# Altium PCB LaserDriver.PcbDoc
Units mm, origin at the board's own origin, x right, y up, seen from the top; angles counter-clockwise.
Board outline 35 x 30 mm, 4 copper layers (Top Layer, VCC, GND, Bottom Layer), stack 1.522 mm thick; 95 components, 43 nets, 260 pads, 215 vias.
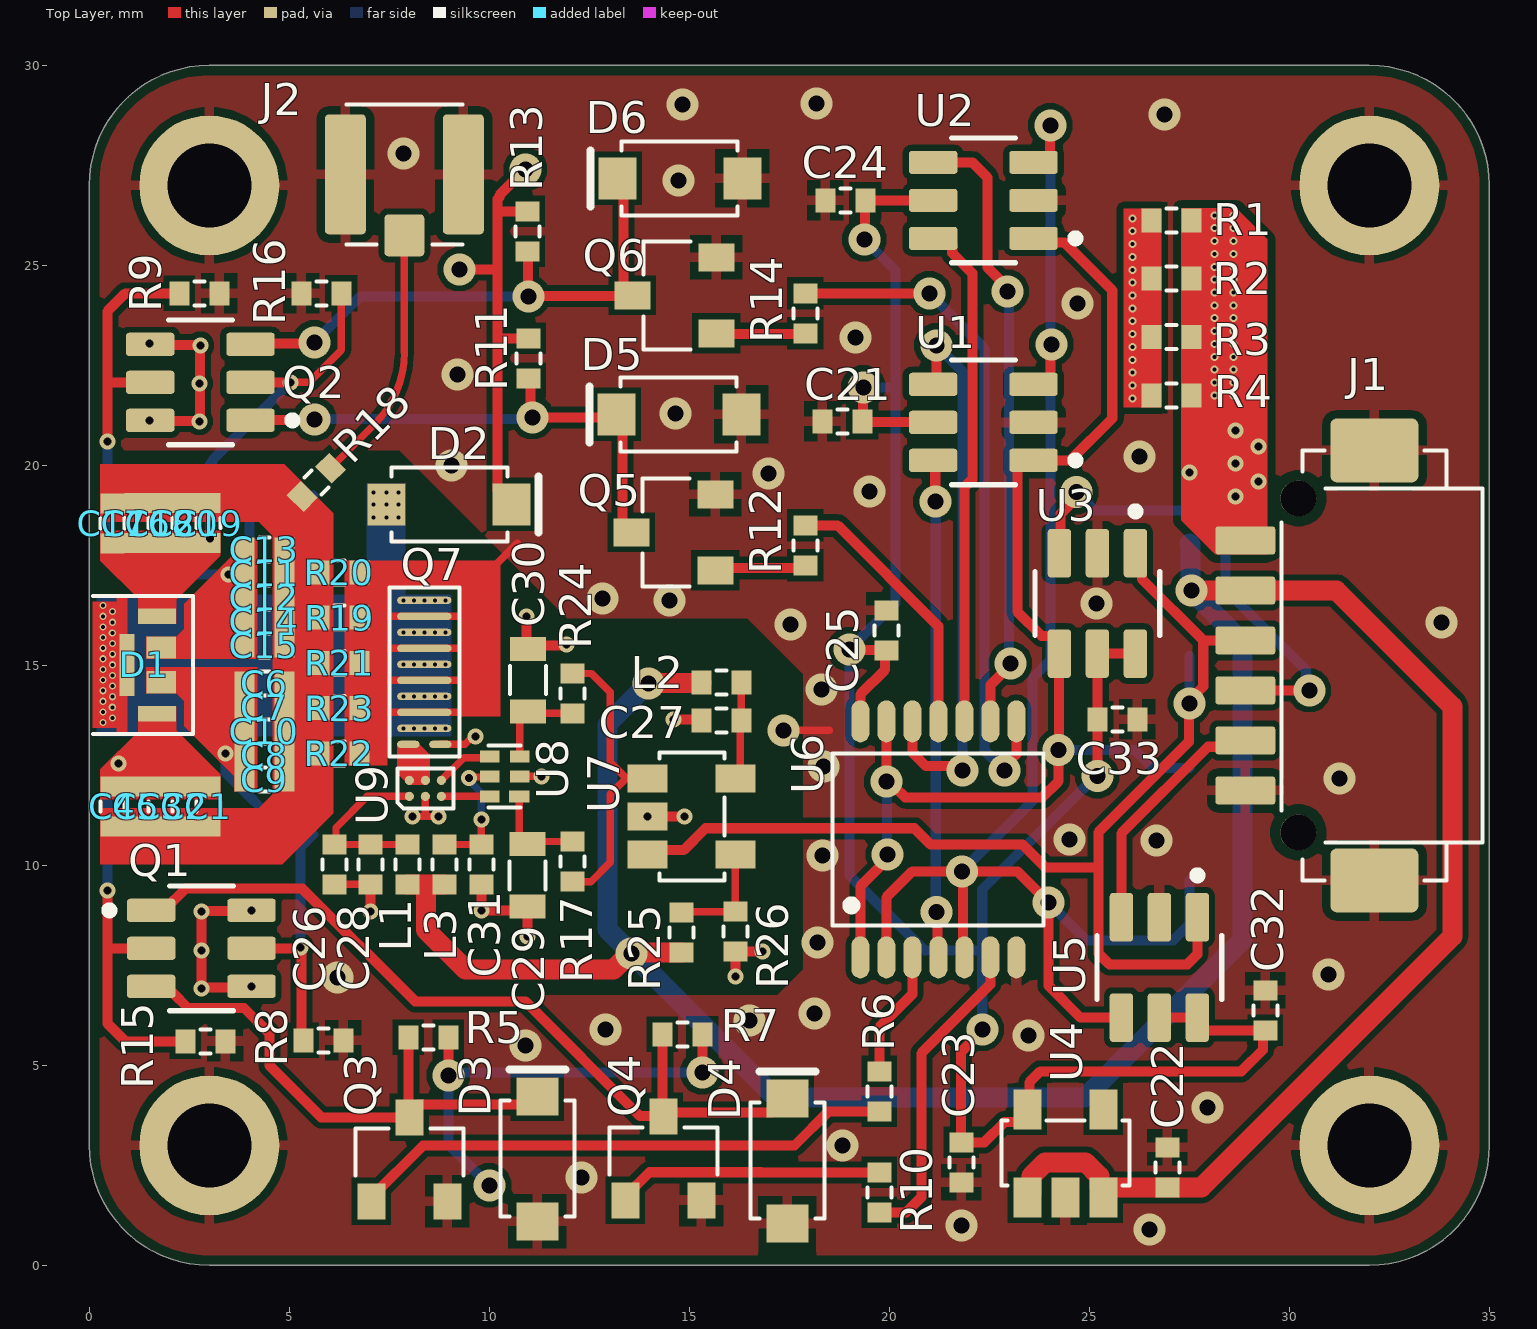
[diagram p0: Top Layer view]
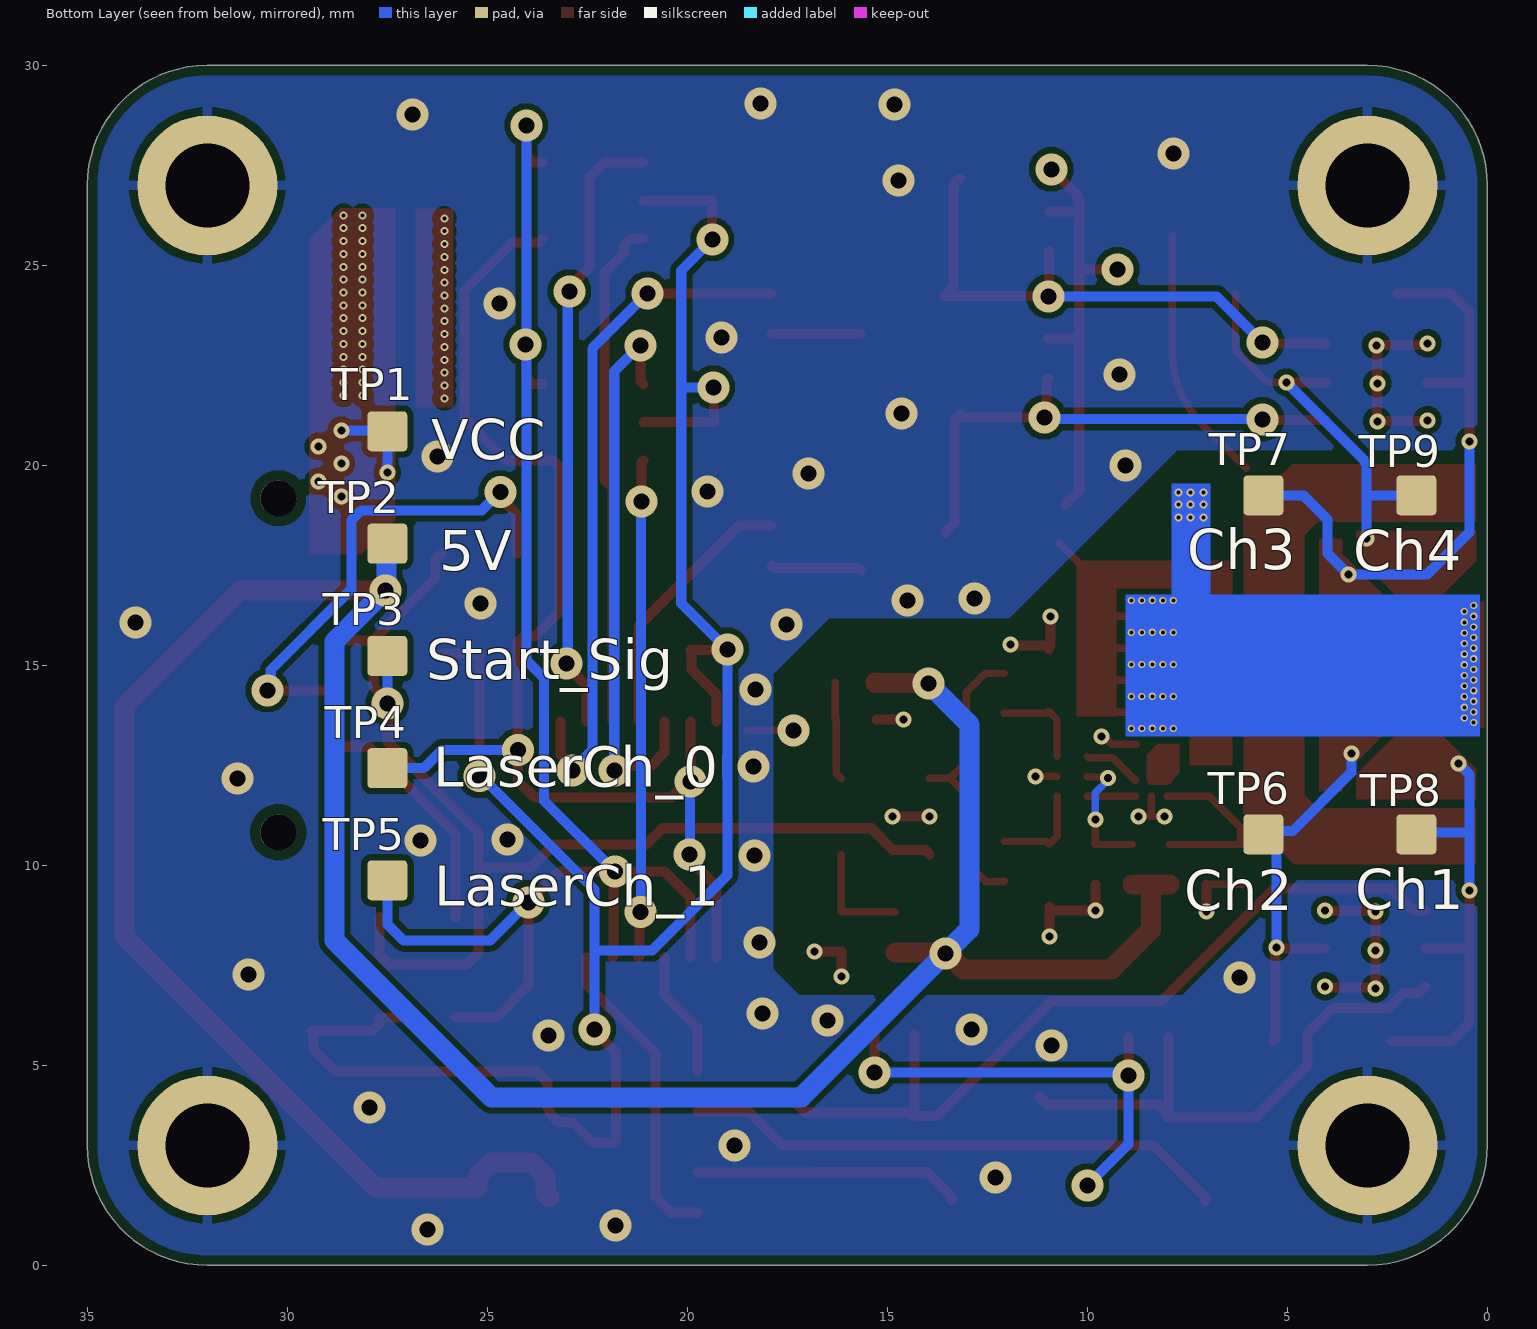
[diagram p1: Bottom Layer view, seen from below]
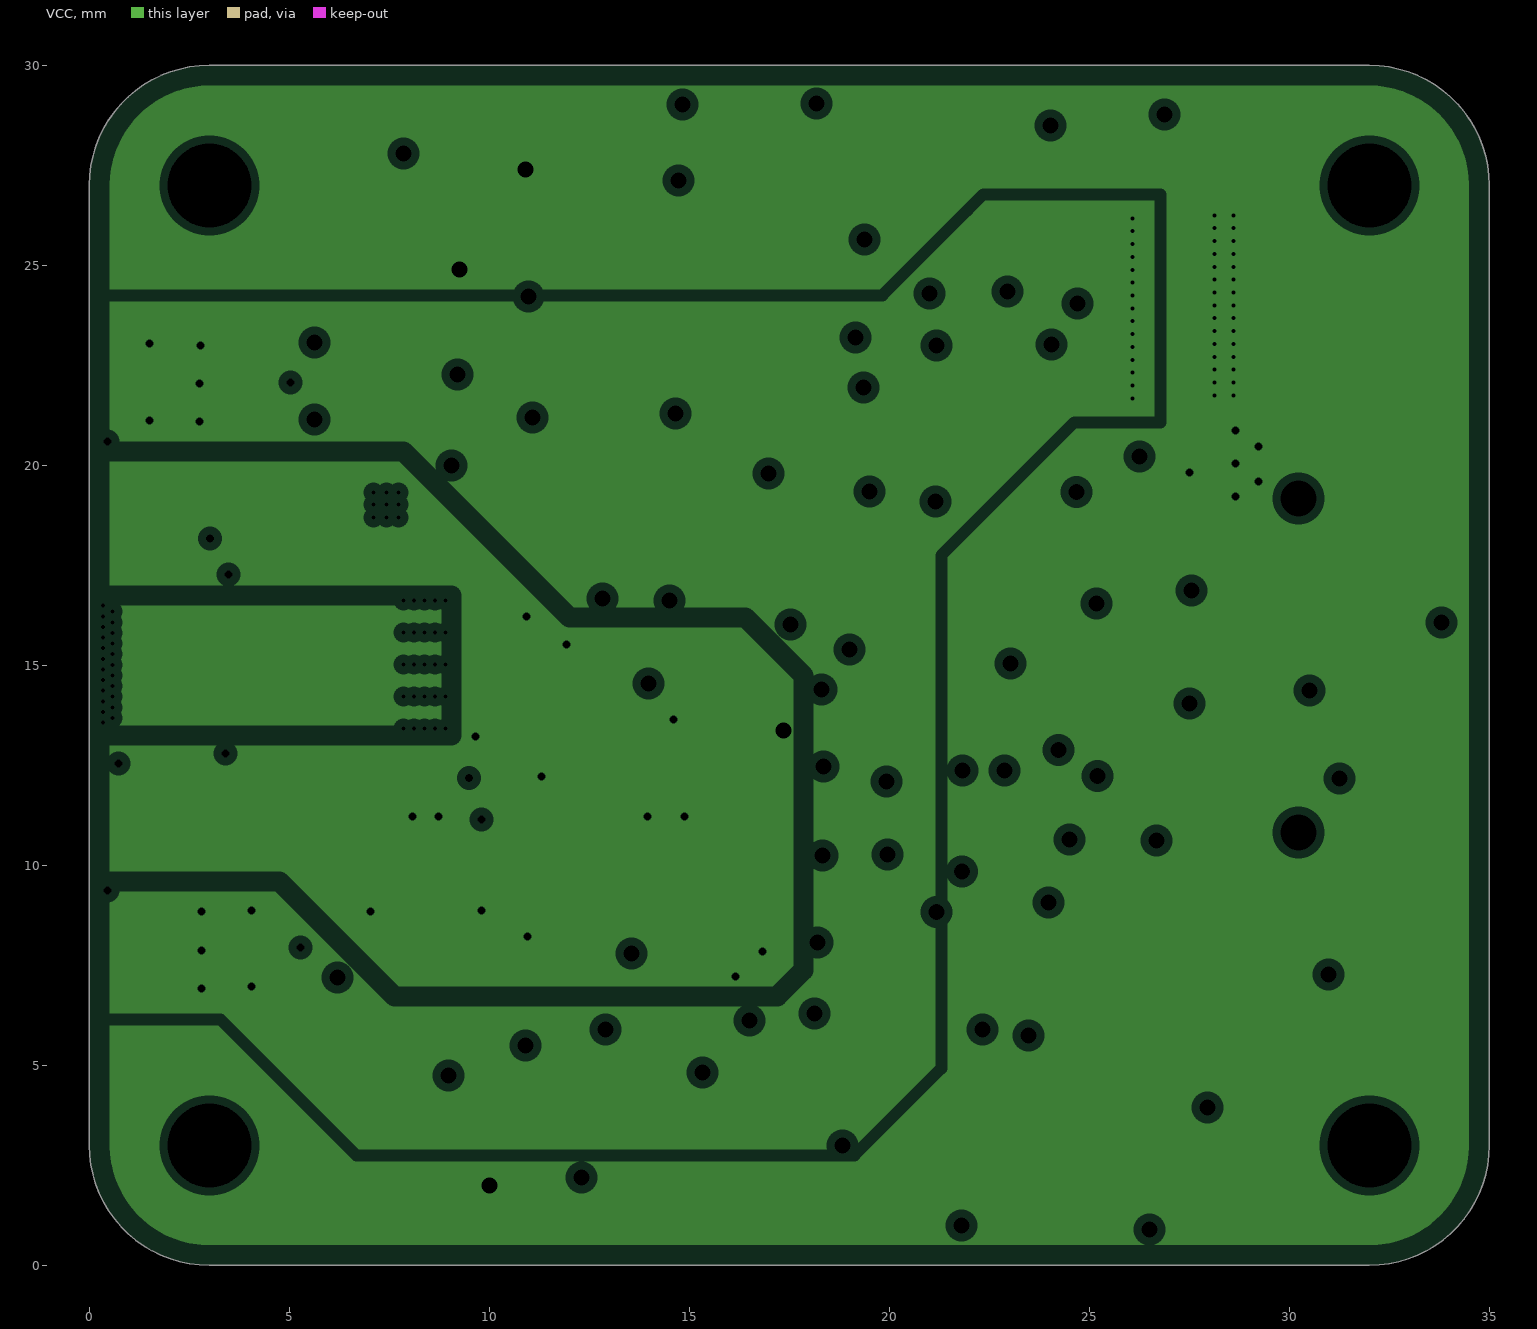
[diagram p2: VCC, clearances drawn from the general rule]
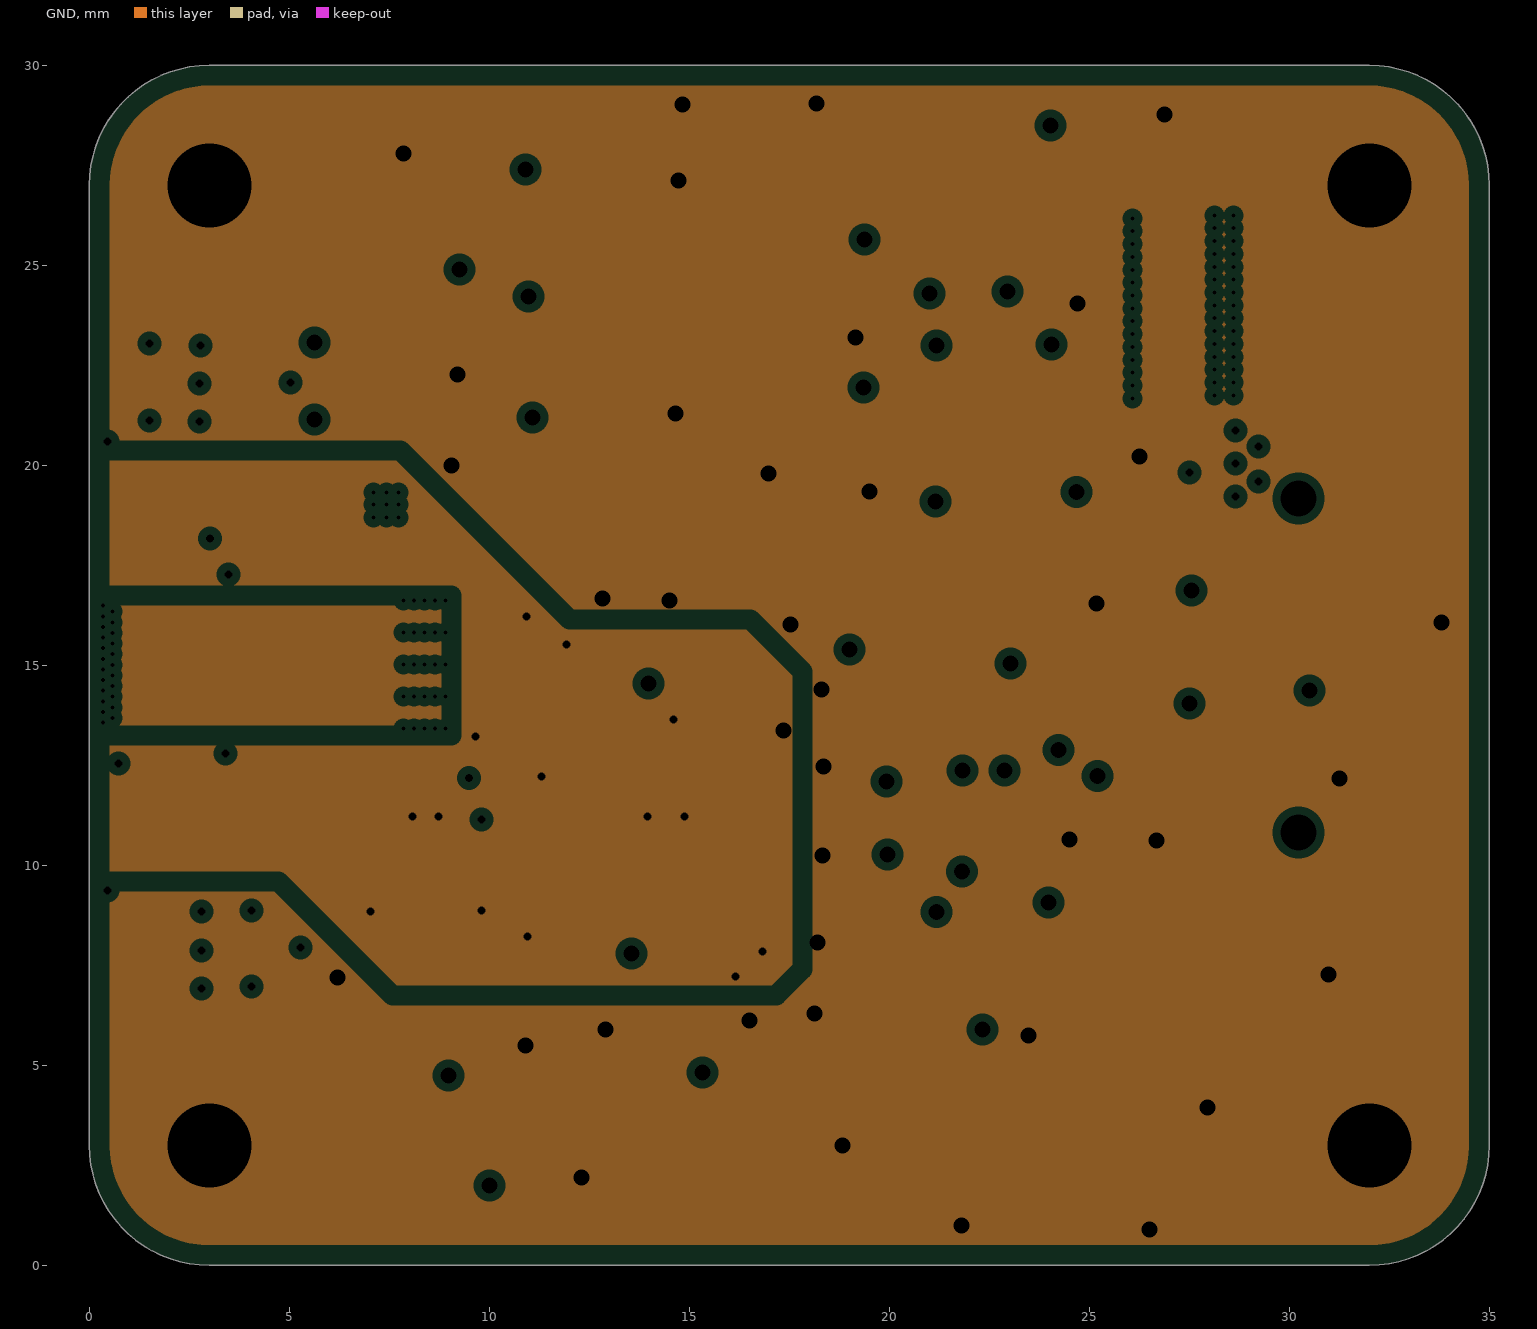
[diagram p3: GND, clearances drawn from the general rule]
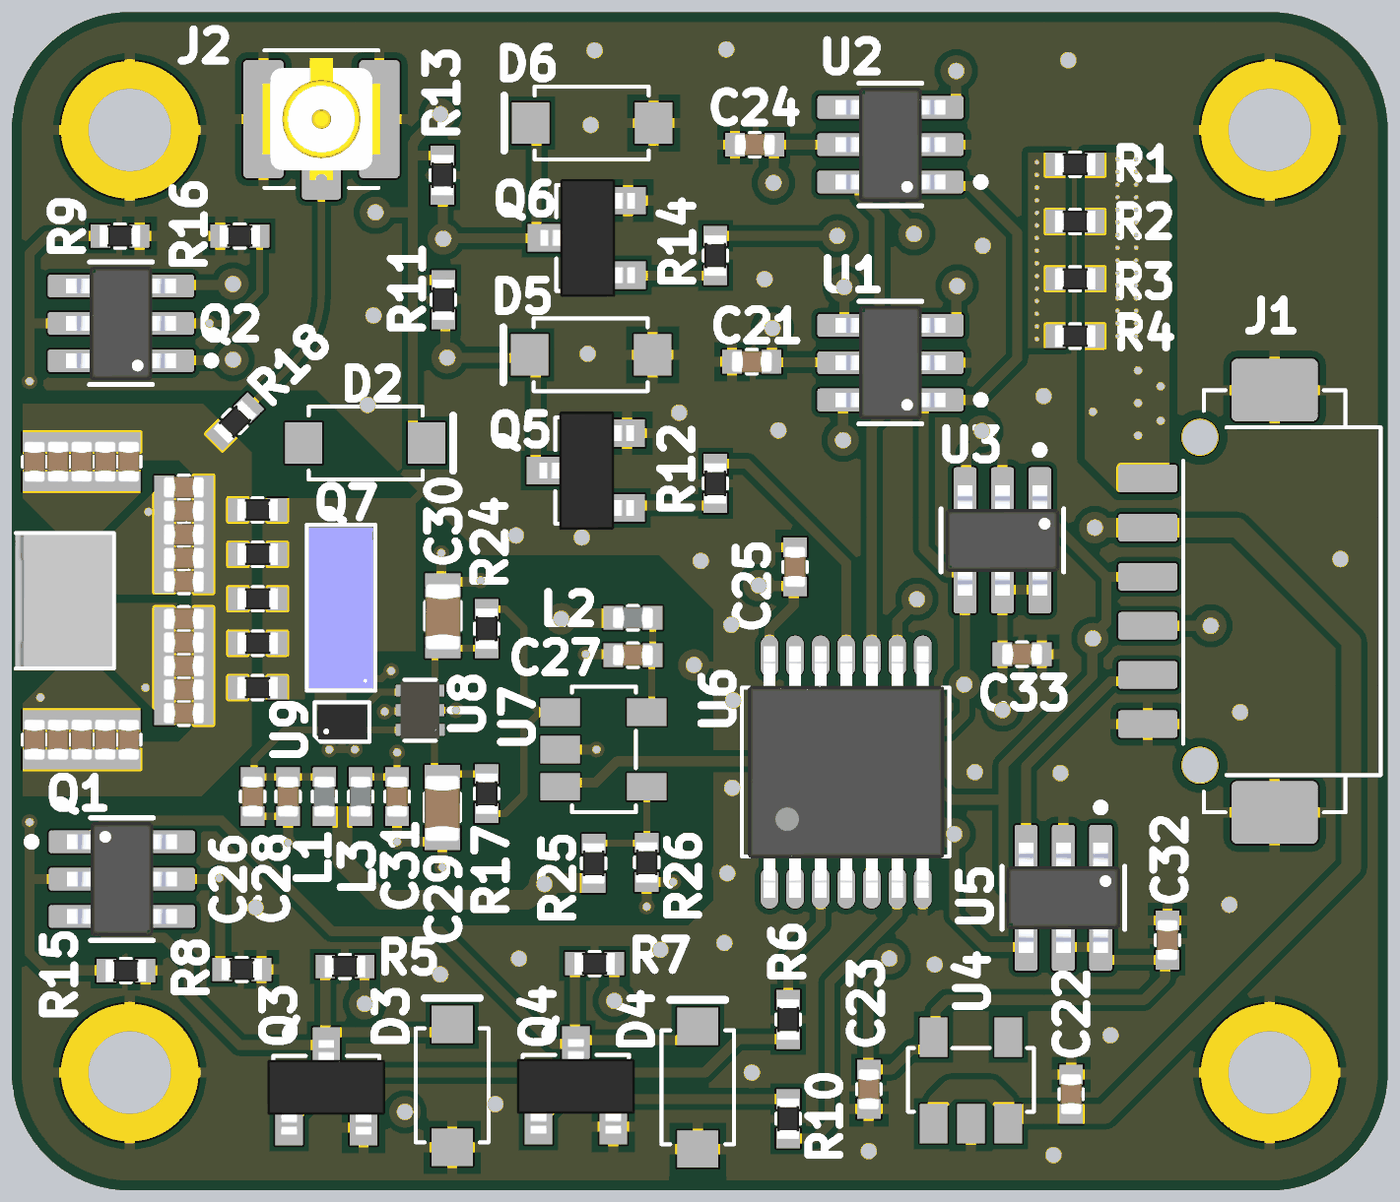
[diagram p4: 3D render of the assembled board from above, using the file's embedded part models]

## Layer stack, top to bottom
Top Solder: solder mask 0.0102, Solder Resist, Dk 3.5
Top Layer: signal copper 0.018
Dielectric 2: prepreg 0.125, PP-006, Dk 4.1
VCC: plane copper 0.018, net (Multiple Nets)
Dielectric 1: dielectric 1.2, FR-4, Dk 4.8
GND: plane copper 0.018, net GND
Dielectric 3: prepreg 0.125, PP-006, Dk 4.1
Bottom Layer: signal copper 0.018
Bottom Solder: solder mask 0.0102, Solder Resist, Dk 3.5

## Board outline
0,3 0,27.001 cw(c3,27.001) 3,30.001 32,30.001 cw(c32,27.001) 35,27.001 35,3 cw(c32,3) 32,0 3,0 cw(c3,3)

## Design rules (kind name [scope] priority, off if disabled: settings)
AcuteAngle [All] p1: minimum=3.50000000000000E+0001 checktracksonly=FALSE
BoardOutlineClearance "BoardOutlineClearance 1" [All] p1: gap=0.25 ignorepadtopadclearanceinfootprint=FALSE except(0: Arc-SplitContinuation Track-SplitContinuation SMDPad-SplitContinuation THPad-SplitContinuation Via-SplitContinuation Fill-SplitContinuation Poly-SplitContinuation Region-SplitContinuation Text-SplitContinuation) // Milling
Clearance "Clearance-1 1/2 Oz" [All] p1: gap=0.125 ignorepadtopadclearanceinfootprint=FALSE except(0.15: Arc-Fill Arc-Poly Track-Fill Track-Poly SMDPad-SMDPad SMDPad-Fill SMDPad-Poly THPad-Fill THPad-Poly Via-Fill Via-Poly Fill-Fill Fill-Poly; 0.2: Poly-Poly Poly-Region Poly-Text; 0.25: Arc-Hole Track-Hole SMDPad-Hole THPad-Hole Via-Hole Fill-Hole Poly-Hole Region-Hole Text-Hole) // Standart
ComponentClearance ComponentClearance_1 [InComponent('C1') or InComponent('C2') or  InComponent('C3') or InComponent('C4') or   InComponent('C5') or InComponent('C6') or   InComponent('C7') or InComponent('C8') or   InComponent('C9') or InComponent('C10') or   InComponent('C11') or InComponent('C12') or   InComponent('C13') or InComponent('C14') or   InComponent('C15') or InComponent('C16') or   InComponent('C16') or InComponent('C18') or   InComponent('C17') or InComponent('C20')] p1: gap=-100 collisioncheckmode=3 verticalgap=2540 showdistances=FALSE
ComponentClearance [All] p2: gap=0.1 collisioncheckmode=3 verticalgap=0.1 showdistances=FALSE
DiffPairsRouting "DiffPairsRouting 1/2 Oz" [All] p1: maxlimit=0.254 minlimit=0.125 mostfreqgap=0.254 toplayer_minwidth=0.125 toplayer_maxwidth=0.381 toplayer_prefwidth=0.381 bottomlayer_minwidth=0.125 bottomlayer_maxwidth=0.381 bottomlayer_prefwidth=0.381 maxuncoupledlength=12.7
HoleSize "Minimum HoleSize" [IsPad] p1: absolutevalues=TRUE maxlimit=5.9 minlimit=0.6 maxpercent=80.000 minpercent=20.000
HoleSize "Minimum HoleSize VIA 1" [IsVia] p2: absolutevalues=TRUE maxlimit=5.9 minlimit=0.1 maxpercent=80.000 minpercent=20.000 // Standart
HoleToHoleClearance Hole2HoleClearance [All] p1: gap=0.15 allowstackedmicrovias=FALSE
MinimumAnnularRing "Minimum AR VIA Standart" [All] p1: minimumring=0.04
MinimumAnnularRing "Minimum AR PAD Standart" [All] p2: minimumring=0.2
MinimumSolderMaskSliver "SolderMask Bridge Standart" [All] p1: minsoldermaskwidth=0.11 // All Masks
PlaneClearance "PlaneClearance-1 1/2 Oz" [All] p1: clearance=0.2 // Standart
PlaneConnect "TermalConnect-1 1/2 Oz" [All] p1: planeconnectstyle=Direct reliefexpansion=0.05 reliefentries=4 reliefconductorwidth=0.2 reliefairgap=0.2 // Standart
PolygonConnect "PolygonConnect-1 1/2 Oz" [All] p1: thpad.connectstyle=Relief thpad.reliefconductorwidth=0.254 thpad.reliefentries=4 thpad.polygonreliefangle="90 Angle" thpad.airgapwidth=0.2 smdpad.connectstyle=Relief smdpad.reliefconductorwidth=0.254 smdpad.reliefentries=4 smdpad.polygonreliefangle="90 Angle" smdpad.airgapwidth=0.2 via.connectstyle=Direct via.reliefconductorwidth=0.254 via.reliefentries=4 via.polygonreliefangle="90 Angle" via.airgapwidth=0.254 // Standart
RoutingCorners [All] p1 off: cornerstyle=45-Degree minsetback=2.54 maxsetback=2.54
RoutingVias [All] p1: holewidth=0.4 width=0.8 viastyle="Through Hole" minholewidth=0.1 minwidth=0.18 maxholewidth=5.9 maxwidth=8.9
SilkToSilkClearance Silk2SilkClearance [All] p1 off: silktosilkclearance=0.15
SilkToSolderMaskClearance Silk2SolderMaskClearance [IsPad] p1 off: minsilkscreentomaskgap=0.15 clearancetoexposedcopper=TRUE
SolderMaskExpansion SolderMaskExpansion-1 [All] p1: expansion=0.05 istentingtop=FALSE // Standart
UnRoutedNet [All] p1: checkbadconnections=TRUE
Width "Width 1/2 Oz" [All] p1: maxlimit=10 minlimit=0.125 preferedwidth=0.254 checkconnectedcopper=TRUE
19 further rules are at their usual default settings.

## Components (designator, comment, footprint, x,y, rotation, side; value= is the part's Value field where it differs from the comment)
C1 "220pF, 100V" "0402 Capicator" 2.975,11.476 r270 top
C2 "220pF, 100V" "0402 Capicator" 2.375,11.476 r270 top
C3 "220pF, 100V" "0402 Capicator" 1.775,11.476 r270 top
C4 "220pF, 100V" "0402 Capicator" 0.575,11.476 r270 top
C5 "220pF, 100V" "0402 Capicator" 1.175,11.476 r270 top
C6 "220pF, 100V" "0402 Capicator" 4.375,14.551 r0 top
C7 "220pF, 100V" "0402 Capicator" 4.375,13.951 r0 top
C8 "220pF, 100V" "0402 Capicator" 4.375,12.752 r0 top
C9 "220pF, 100V" "0402 Capicator" 4.375,12.151 r0 top
C10 "220pF, 100V" "0402 Capicator" 4.375,13.351 r0 top
C11 "220pF, 100V" "0402 Capicator" 4.375,17.301 r0 top
C12 "220pF, 100V" "0402 Capicator" 4.375,16.701 r0 top
C13 "220pF, 100V" "0402 Capicator" 4.375,17.901 r0 top
C14 "220pF, 100V" "0402 Capicator" 4.375,16.101 r0 top
C15 "220pF, 100V" "0402 Capicator" 4.375,15.501 r0 top
C16 "220pF, 100V" "0402 Capicator" 1.175,18.555 r90 top
C17 "220pF, 100V" "0402 Capicator" 0.575,18.551 r90 top
C18 "220pF, 100V" "0402 Capicator" 1.775,18.555 r90 top
C19 "220pF, 100V" "0402 Capicator" 2.975,18.555 r90 top
C20 "220pF, 100V" "0402 Capicator" 2.375,18.555 r90 top
C21 "0.1uF, 16V" "0402 Capicator" 18.825,21.101 r180 top
C22 "1uF, 16V" "0402 Capicator" 26.95,2.45 r270 top
C23 "1uF, 16V" "0402 Capicator" 21.8,2.576 r90 top
C24 "0.1uF, 16V" "0402 Capicator" 18.9,26.626 r180 top
C25 "0.1uF, 16V" "0402 Capicator" 19.925,15.876 r90 top
C26 "0.1uF, 16V" "0402 Capicator" 6.125,10.026 r90 top
C27 "0.1uF, 16V" "0402 Capicator" 15.8,13.626 r0 top
C28 "0.1uF, 16V" "0402 Capicator" 7.025,10.026 r90 top
C29 "8pF, 50V" "0603 Capicator" 10.95,9.751 r270 top
C30 "8pF, 50V" "0603 Capicator" 10.965,14.631 r270 top
C31 "0.1uF, 16V" "0402 Capicator" 9.8,10.026 r90 top
C32 "0.1uF, 16V" "0402 Capicator" 29.4,6.375 r270 top
C33 "0.1uF, 16V" "0402 Capicator" 25.7,13.65 r180 top
D1 "Laser" "SPL S4L90A_3 A01" 2.17,15.011 r90 top
D2 "120V, 1A" SOD-123FL 7.425,19.026 r0 top
D3 "120V, 1A" SOD-123FL 11.2,1.1 r90 top
D4 "120V, 1A" SOD-123FL 17.45,1.051 r90 top
D5 "120V, 1A" SOD-123FL 16.3,21.276 r180 top
D6 "120V, 1A" SOD-123FL 16.325,27.176 r180 top
J1 "DF13-6P" DF13-6p-1.25H 29.1,11.875 r90 top
J2 "Antenna" "IPX U. FL" 7.875,27.276 r0 top
L1 "330Ω, 700mA" "0402 Inductor" 7.95,10.026 r90 top
L2 "330Ω, 700mA" "0402 Inductor" 15.8,14.576 r0 top
L3 "330Ω, 700mA" "0402 Inductor" 8.875,10.026 r90 top
Q1 "100V, 1.2A, 350mΩ" SOT236 2.8,7.926 r0 top
Q2 "100V, 1.2A, 350mΩ" SOT236 2.775,22.076 r180 top
Q3 "180V, 600mA" SOT-23 7.05,1.601 r0 top
Q4 "180V, 600mA" SOT-23 13.4,1.626 r0 top
Q5 "180V, 600mA" SOT-23 15.65,17.376 r90 top
Q6 "180V, 600mA" SOT-23 15.675,23.301 r90 top
Q7 "100V, 36A, 7mΩ" EPC2001C 8.375,13.026 r90 top
R1 "3.9k" "0402 Resistor" 27.05,24.668 r180 top
R2 "3.9k" "0402 Resistor" 27.05,21.751 r180 top
R3 "3.9k" "0402 Resistor" 27.05,26.126 r180 top
R4 "3.9k" "0402 Resistor" 27.05,23.21 r180 top
R5 "1k" "0402 Resistor" 8.475,5.701 r0 top
R6 "200R" "0402 Resistor" 19.75,4.351 r270 top
R7 "1k" "0402 Resistor" 14.825,5.776 r0 top
R8 "100k" "0402 Resistor" 5.85,5.627 r180 top
R9 "100k" "0402 Resistor" 2.75,24.3 r180 top
R10 "200R" "0402 Resistor" 19.75,1.826 r90 top
R11 "1k" "0402 Resistor" 10.975,22.676 r90 top
R12 "200R" "0402 Resistor" 17.9,18.001 r270 top
R13 "1k" "0402 Resistor" 10.95,25.851 r90 top
R14 "200R" "0402 Resistor" 17.9,23.801 r270 top
R15 "100k" "0402 Resistor" 2.9,5.6 r180 top
R16 "100k" "0402 Resistor" 5.8,24.3 r0 top
R17 "100R" "0402 Resistor" 12.075,10.101 r90 top
R18 "51R" "0402 Resistor" 5.675,19.575 r45 top
R19 "0.2R" "0402 Resistor" 6.254,16.195 r180 top
R20 "0.2R" "0402 Resistor" 6.25,17.326 r180 top
R21 "0.2R" "0402 Resistor" 6.254,15.064 r180 top
R22 "0.2R" "0402 Resistor" 6.25,12.801 r180 top
R23 "0.2R" "0402 Resistor" 6.254,13.933 r180 top
R24 "180R" "0402 Resistor" 12.075,14.301 r270 top
R25 "10k" "0402 Resistor" 14.8,8.326 r270 top
R26 "1k" "0402 Resistor" 16.15,8.351 r90 top
TP1 "TestPoint" TestPoint 27.5,20.851 r90 bottom
TP2 "TestPoint" TestPoint 27.5,18.045 r90 bottom
TP3 "TestPoint" TestPoint 27.5,15.239 r90 bottom
TP4 "TestPoint" TestPoint 27.5,12.433 r90 bottom
TP5 "TestPoint" TestPoint 27.5,9.626 r90 bottom
TP6 "TestPoint" TestPoint 5.6,10.776 r90 bottom
TP7 "TestPoint" TestPoint 5.6,19.251 r90 bottom
TP8 "TestPoint" TestPoint 1.775,10.776 r90 bottom
TP9 "TestPoint" TestPoint 1.775,19.251 r90 bottom
U1 "Inv" SOT236 22.35,21.076 r180 top
U2 "Inv" SOT236 22.35,26.626 r180 top
U3 "D-Trig" SOT236 25.2,16.55 r270 top
U4 "LDO 1.8V" SOT-23-5 24.4,1.701 r0 top
U5 "D-Trig" SOT236 26.75,7.45 r270 top
U6 "2NAND" TSSOP-14 19.275,7.701 r0 top
U7 "OpAmp" SOT-23-5 13.95,11.226 r270 top
U8 "Buff" "MicroPak 6-Lead" 10.76,11.726 r90 top
U9 "Driver" WCSP 8,11.726 r90 top

## Footprints (in the part's own frame and the unit in brackets; to place one, negate y for a bottom-side part, rotate by r counter-clockwise, add the part's x,y. Pads: shape width x height; smd on the part's side, far side on the other; paste and mask are expansions set on the pad)
"0402 Capicator" [mm]
  rect 0.5x0.6 smd: 1(-0.5,0) 2(0.5,0)
  silkscreen extent -0.13,-0.3 0.13,0.3, body extent -0.53,-0.28 0.53,0.28, height 0.55
"0402 Inductor" [mm]
  rect 0.5x0.6 smd: 1(-0.5,0) 2(0.5,0)
  silkscreen extent -0.13,-0.3 0.13,0.3, body extent -0.53,-0.28 0.53,0.28, height 0.55
"0402 Resistor" [mm]
  rect 0.5x0.6 smd: 1(-0.5,0) 2(0.5,0)
  silkscreen extent -0.13,-0.3 0.13,0.3, body extent -0.53,-0.28 0.53,0.28, height 0.4
"0603 Capicator" [mm]
  rect 0.6x0.9 smd: 1(-0.78,0) 2(0.78,0)
  silkscreen extent -0.35,-0.45 0.35,0.45, body extent -0.82,-0.45 0.88,0.45, height 0.9
DF13-6p-1.25H [mm]
  rrect20% 0.7x1.5 smd: 1(6.25,0.2) 2(5,0.2) 3(3.75,0.2) 4(2.5,0.2) 5(1.25,0.2) 6(0,0.2)
  rrect20% 1.6x2.2 smd: A(-2.25,-3.025) A(8.5,-3.025)
  round 0.9 hole 0.9: B(-1.05,-1.125) B(7.3,-1.125)
  silkscreen extent -2.25,-5.72 8.5,-0.7, body extent -2.93,-5.75 9.22,0.75, height 3.58
EPC2001C [mm]
  oval 0.18x0.56 smd mask+0.025: 1(0,0.401) 4(0,-0.401)
  oval 0.18x1.36 smd mask+0.025: 3(0.4,0) 3(1.2,0) 3(2,0) 3(2.8,0) 3(3.6,0) 4(0.8,0) 4(1.6,0) 4(2.4,0) 4(3.2,0)
  silkscreen extent -0.3,-0.87 3.93,0.87, body extent -0.25,-0.82 3.86,0.82, height 0.78
"IPX U. FL" [mm]
  rrect20% 1x1.05 smd: 1(0,-1.525)
  rrect20% 1.025x3 smd: A(-1.475,0) A(1.475,0)
  silkscreen extent -1.45,-1.75 1.45,1.75, body extent -1.5,-1.55 1.5,1.55, height 1.25
"MicroPak 6-Lead" [mm]
  rrect10% 0.3x0.52 smd mask+0.025: 1(0,0.01)
  rrect10% 0.3x0.49 smd mask+0.025: 2(0.5,0) 3(1,0) 4(1,0.75) 5(0.5,0.75) 6(0,0.75)
  silkscreen extent -0.28,-0.03 1.28,0.77, body extent -0.22,-0.12 1.22,0.87, height 0.56
SOD-123FL [mm]
  rect 0.95x1.05 smd: 1(0,0) 2(3.125,0)
  silkscreen extent 0.13,-0.92 3.8,0.92, body extent -0.22,-0.82 3.37,0.82, height 0.95
SOT236 [mm]
  rrect25% 1.21x0.58 smd: 1(-1.255,0.95) 2(-1.255,0) 3(-1.255,-0.95) 4(1.255,-0.95) 5(1.255,0) 6(1.255,0.95)
  silkscreen extent -2.4,-1.56 0.8,1.56, body extent -1.4,-1.45 1.4,1.45, height 1.45
SOT-23 [mm]
  rect 0.7x0.9 smd: 1(0,0) 2(1.9,0) 3(0.95,2.1)
  silkscreen extent -0.4,0.65 2.3,1.83, body extent -0.55,-0.17 2.45,2.23, height 1.1
SOT-23-5 [mm]
  rect 0.7x1 smd mask+0.045: 1(-0.95,0) 2(0,0) 3(0.95,0) 4(0.95,2.2) 5(-0.95,2.2)
  silkscreen extent -1.6,0.3 1.6,1.92, body extent -1.5,-0.15 1.5,2.35, height 1.1
"SPL S4L90A_3 A01" [mm]
  rrect5% 0.385x0.95 smd mask+0.05: 1(-1.218,0.475) 4(1.218,0.475)
  rrect5% 0.56x0.74 smd mask+0.05: 2(-0.435,0.37) 3(0.435,0.37)
  rrect5% 1.55x0.375 smd mask+0.05: 5(0,1.228)
  Top Layer region: -1.675,1.228 -1.675,1.488 -1.575,1.488 -1.575,2.088 1.575,2.088 1.575,1.488 1.675,1.488 1.675,1.228 0.715,1.228 0.718,1.075 -0.725,1.075 -0.725,1.228
  silkscreen extent -1.73,-0.43 1.73,2.07, body extent -1.67,-0.37 1.68,2.08, height 0.68
TestPoint [mm]
  rrect20% 1x1 smd paste-0.5: 1(0,0)
TSSOP-14 [mm]
  oval 0.45x1.05 smd paste+0 mask+0.025: 1(0,0) 2(0.65,0) 3(1.3,0) 4(1.95,0) 5(2.6,0) 6(3.25,0) 7(3.9,0) 8(3.9,5.9) 9(3.25,5.9) 10(2.6,5.9) 11(1.95,5.9) 12(1.3,5.9) 13(0.65,5.9) 14(0,5.9)
  silkscreen extent -0.7,0.8 4.57,5.1, body extent -0.55,-0.25 4.45,6.15, height 1.1
WCSP [mm]
  round 0.23 smd mask+0.025: A1(0,0) A2(0.4,0) B1(0,-0.4) B2(0.4,-0.4) C1(0,-0.8) C2(0.4,-0.8)
  silkscreen extent -0.3,-1.1 0.7,0.3, body extent -0.24,-1.02 0.64,0.2, height 0.63

## Part data
C1 C2 C3 C4 C5 C6 C7 C8 C9 C10 C11 C12 C13 C14 C15 C16 C17 C18 C19 C20: library part "Cap 220pF (0402)", "NP0 220pF 100V 5% 0402", Manufacturer=TDK, Part Number=C1005C0G2A221J050BA, ComponentLink1Description=Chip&Dip, ComponentLink1URL=https://www.chipdip.ru/product/c1005c0g2a221j050ba, Type=Capacitor
C21 C24 C25 C26 C27 C28 C31 C32 C33: library part "Cap 0.1uF (0402)", "X7R 0.1uF 16V 10% 0402", Manufacturer="Murata Electronics", Part Number=GRM155R71C104KA88B, ComponentLink1Description=Chip&Dip, ComponentLink1URL=https://www.chipdip.ru/product/grm155r71c104k, Type=Capacitor
C22 C23: library part "Cap 1uF (0402)", "X5R 0.1uF 16V 10% 0402", Manufacturer="Murata Electronics", Part Number=GRM155R61C105KA12D, ComponentLink1Description=Chip&Dip, ComponentLink1URL=https://www.chipdip.ru/product/grm155r61c105ka12d, Type=Capacitor
C29 C30: library part "Cap 8pF (0603)", "8pF±0.1pF NP0 50V 0603", Manufacturer="Murata Electronics", Part Number=GRM1885C1H8R0BA01D, ComponentLink1Description=DigiKey, ComponentLink1URL=https://www.digikey.com/en/products/detail/murata-electronics/GRM1885C1H8R0BA01D/4421695?s=N4IgTCBcDaIOICUCyBGAHGgrAYRQCTQQAYAhAQSJQBEQBdAXyA, Type=Capacitor
D1: library part "Laser 4 Channel", "4 Channel SMT Laser in QFN package", Manufacturer="OSRAM Opto Semiconductors", Part Number="SPL S4L90A_3 A01", ComponentLink1Description=DataSheet, ComponentLink1URL=https://www.osram.com/ecat/SMT%20Laser%20SPL%20S4L90A_3%20A01/com/en/class_pim_web_catalog_103489/prd_pim_device_4071163/#62a1fdff42f13778e2055fdc87c50fcb, ComponentLink2Description=Mouser, ComponentLink2URL=https://ru.mouser.com/ProductDetail/OSRAM-Opto-Semiconductors/SPL-S4L90A_3-A01?qs=OlC7AqGiEDn4aov%2F5GIeZw%3D%3D, Type=Diode
D2 D3 D4 D5 D6: library part "Diode Schottky (SOD-123FL)", Manufacturer="Yangzhou Yangjie Electronic Technology Co", Part Number=S120, ComponentLink1Description=DataSheet, ComponentLink1URL=https://static.chipdip.ru/lib/152/DOC001152954.pdf, ComponentLink2Description=Chip&Dip, ComponentLink2URL=https://www.chipdip.ru/product/s120, Type=Diode
J1: library part "Conn 6 [DF13]", "[DF13-6P-1.25H]", Manufacturer=Hirose, Part Number=CL0536-0255-2-75, ComponentLink1Description=Hirose, ComponentLink1URL=https://www.hirose.com/product/p/CL0536-0255-2-75?lang=ru, Type=Connector
J2: library part "Connector SMT", "[IPX U. FL]", Manufacturer="DIY BOX", Part Number="IPX U. FL", ComponentLink1Description=AliExpress, ComponentLink1URL=https://aliexpress.ru/i/32666421757.html, Type=Connector
L1 L2 L3: library part "Ferrite Bead 330 (0402)", "Chip beads for power line. GHz noise countermeasure", Manufacturer=TDK, Part Number=MPZ1005S331ET000, ComponentLink1Description=DataSheet, ComponentLink1URL=https://product.tdk.com/en/system/files?file=dam/doc/product/emc/emc/beads/catalog/beads_commercial_power_mpz1005-e_en.pdf, ComponentLink2Description=DigiKey, ComponentLink2URL=https://www.digikey.com/en/products/detail/tdk-corporation/MPZ1005S331ET000/3910121?s=N4IgTCBcDaILIAUBaBGADGgrAZQMy5QFEAVDNEAXQF8g, Type=Inductor
Q1 Q2: library part "MOSFET-N x2 [FDC86]", "Dual N-Channel Shielded Gate PowerTrench", Manufacturer=Onsemi, Part Number=FDC8602, ComponentLink1Description=DataSheet, ComponentLink1URL=https://www.onsemi.com/pdf/datasheet/fdc8602-d.pdf, ComponentLink2Description=DigiKey, ComponentLink2URL=https://www.digikey.com/en/products/detail/onsemi/FDC8602/3025438, Type=Transistor
Q3 Q4 Q5 Q6: library part "NPN [MMBT]", "NPN high voltage transistor. AEC−Q101 Qualified and PPAP Capable.", Manufacturer="ON Semiconductor", Part Number=MMBT5551LT1G, ComponentLink1Description=DataSheet, ComponentLink1URL=https://static.chipdip.ru/lib/933/DOC011933862.pdf, ComponentLink2Description=Chip&Dip, ComponentLink2URL=https://www.chipdip.ru/product/mmbt5551, Type=Transistor
Q7: library part "MOSFET-N [EPC]", "eGaN FET", Manufacturer=EPC, Part Number=EPC2001C, ComponentLink1Description=DataSheet, ComponentLink1URL=https://epc-co.com/epc/Portals/0/epc/documents/datasheets/EPC2001C_datasheet.pdf, ComponentLink2Description=DigiKey, ComponentLink2URL=https://www.digikey.com/en/products/detail/epc/EPC2001C/5031688, Type=Transistor
R1 R2 R3 R4: library part "Res 3.9k (0402)", "0.062W 0403 3.9k 1%", Manufacturer=Taiwan, Part Number=RC0402FR-073K9L, ComponentLink1Description=Chip&Dip, ComponentLink1URL=https://www.chipdip.ru/product0/9000189824, Type=Resistor
R5 R7 R11 R13 R26: library part "Res 1k (0402)", "0.062W 0403 1k 1%", Manufacturer=Taiwan, Part Number=RC0402FR-071KL, ComponentLink1Description=Chip&Dip, ComponentLink1URL=https://www.chipdip.ru/product0/9000189652, Type=Resistor
R6 R10 R12 R14: library part "Res 200R (0402)", "0.062W 0403 200R 1%", Manufacturer=Taiwan, Part Number=RC0402FR-07200RL, ComponentLink1Description=Chip&Dip, ComponentLink1URL=https://www.chipdip.ru/product0/9000189769, Type=Resistor
R8 R9 R15 R16: library part "Res 100k (0402)", "0.062W 0403 100k 1%", Manufacturer=Taiwan, Part Number=RC0402FR-07100KL, ComponentLink1Description=Chip&Dip, ComponentLink1URL=https://www.chipdip.ru/product0/9000189665, Type=Resistor
R17: library part "Res 100R (0402)", "0.062W 0403 100R, 1%", Manufacturer=Taiwan, Part Number=RC0402JR-07100RL, ComponentLink1Description=Chip&Dip, ComponentLink1URL=https://www.chipdip.ru/product0/9000189639, Type=Resistor
R18: library part "Res 51R (0402)", "0.062W 0403 51R 1%", Manufacturer=Taiwan, Part Number=RC0402FR-0751RL, ComponentLink1Description=Chip&Dip, ComponentLink1URL=https://www.chipdip.ru/product0/9000189745, Type=Resistor
R19 R20 R21 R22 R23: library part "Res 0.2R (0402)", "0.125W 0402 0.2R, 1%", Manufacturer=Rohm, Part Number=UCR01MVPFLR200, ComponentLink1Description=DigiKey, ComponentLink1URL=https://www.digikey.com/en/products/detail/rohm-semiconductor/UCR01MVPFLR200/4053578?s=N4IgTCBcDaIKoGEBKAGAjAWQGoAUBiAMkmCiiALoC%2BQA, Type=Resistor
R24: library part "Res 180R (0402)", "0.062W 0403 180R, 1%", Manufacturer=Taiwan, Part Number=RC0402FR-07180RL, ComponentLink1Description=Chip&Dip, ComponentLink1URL=https://www.chipdip.ru/product0/9000189767, Type=Resistor
R25: library part "Res 10k (0402)", "0.062W 0403 10k 1%", Manufacturer=Taiwan, Part Number=RC0402FR-0710KL, ComponentLink1Description=Chip&Dip, ComponentLink1URL=https://www.chipdip.ru/product0/9000189664, Type=Resistor
U1 U2: library part "Inverter (SN74)", "Dual inverter, 1.65-5.5V", Manufacturer="Texas Instruments", Part Number=SN74LVC2G04DBVR, ComponentLink1Description=Chip&Dip, ComponentLink1URL=https://www.chipdip.ru/product/sn74lvc2g04dbvr-2, ComponentLink2Description=DataSheet, ComponentLink2URL=https://static.chipdip.ru/lib/021/DOC001021810.pdf, Type=IC
U3 U5: library part "D-Trigger [SN74LVC1G175DBVR]", "The single D-type flip-flop designed for 1.65-V to 5.5-V VCC operation", Manufacturer="Texas Instruments", Part Number=SN74LVC1G175DBVR, ComponentLink1Description=DataSheet, ComponentLink1URL=https://static.chipdip.ru/lib/170/DOC001170956.pdf, ComponentLink2Description=Chip&Dip, ComponentLink2URL=https://www.chipdip.ru/product/sn74lvc1g175dbvr, Type=IC
U4: library part "LDO 1.8V [ADP]", "Ultralow noise: 9 μV rms No noise bypass capacitor required Stable with 1 μF ceramic input and output capacitors Maximum output current: 200 mA Input voltage range: 2.2 V to 5.5 V", Manufacturer="Analog Devices", Part Number=ADP151AUJZ-1.8-R7, ComponentLink1Description=DataSheet, ComponentLink1URL=https://static.chipdip.ru/lib/986/DOC003986583.pdf, ComponentLink2Description=Chip&Dip, ComponentLink2URL=https://www.chipdip.ru/product/adp151aujz-1.8-r7, Type=IC
U6: library part "4(2NAND) 1.5V Logic", "4 logic elements \"2NAND\"", Manufacturer="Fairchild Semiconductor", Part Number=74VHC00MTC, ComponentLink1Description=DataSheet, ComponentLink1URL=https://static.chipdip.ru/lib/318/DOC000318768.pdf, ComponentLink2Description=ChipDip, ComponentLink2URL=https://www.chipdip.ru/product/74vhc00mtc, Type=IC
U7: library part "OpAmp [OPA354]", "The OPAx354 series of op amps are optimized for operation on single or dual supplies as low as 2.5 V (±1.25 V) and up to 5.5 V (±2.75 V). Common-mode input range extends beyond the supplies. The output swing is within 100 mV of the rails, supporting wide dynamic range.", Manufacturer="Texas Instruments", Part Number=OPA354AIDBVR, ComponentLink1Description=DataSheet, ComponentLink1URL=https://static.chipdip.ru/lib/876/DOC003876961.pdf, ComponentLink2Description=Chip&Dip, ComponentLink2URL=https://www.chipdip.ru/product/opa354aidbvr-ti, Type=IC
U8: library part "Buffer [NC7]", "Dual buffer Ultra-High Speed Series. The  device is fabricated with advanced CMOS technology to achieve ultra-high speed  with high output drive while maintaining low static power dissipation over  a  very broad VCC operating range.", Manufacturer=Onsemi, Part Number=NC7WZ16L6X, ComponentLink1Description=DigiKey, ComponentLink1URL=https://www.digikey.com/en/products/detail/onsemi/NC7WZ16L6X/1050447?s=N4IgTCBcDaIHIGEDsB1AWgRgGwBksA0QBdAXyA, ComponentLink2Description=DataSheet, ComponentLink2URL=https://rocelec.widen.net/view/pdf/z73gngtavr/ONSM-S-A0003590680-1.pdf?t.download=true&u=5oefqw, Type=IC
U9: library part "MOSFET Driver [LMG]", "The LM1501Aseries of regulators are monolithic integrated circuits that provideall the active functions for astep-down  switching  regulator,  capable  ofdriving  a  5A  load  with  excellent  line  and  load  regulation.", Manufacturer="Texas Instruments", Part Number=LMG1020, ComponentLink1Description=DigiKey, ComponentLink1URL=https://www.digikey.com/en/products/detail/texas-instruments/LMG1020YFFT/9489635, ComponentLink2Description=DataSheet, ComponentLink2URL=https://www.ti.com/lit/ds/symlink/lmg1020.pdf?HQS=dis-dk-null-digikeymode-dsf-pf-null-wwe&ts=1633629477689&ref_url=https%253A%252F%252Fwww.ti.com%252Fgeneral%252Fdocs%252Fsuppproductinfo.tsp%253FdistId%253D10%2526gotoUrl%253Dhttps%253A%252F%252Fwww.ti.com%252Flit%252Fgpn%252Flmg1020, Type=IC

## Free pads (board coordinates)
  round 3.5 hole 2.1: A(3,3) A(3,27) A(32,3) A(32,27)

## Via types
v1: diameter 0.8, hole 0.4, Top Layer to Bottom Layer, tented both sides, 73 vias
v2: diameter 0.2, hole 0.1, Top Layer to Bottom Layer, tented both sides, 54 vias
v3: diameter 0.18, hole 0.1, Top Layer to Bottom Layer, tented both sides, 48 vias
v4: diameter 0.4, hole 0.2, Top Layer to Bottom Layer, tented both sides, 40 vias

## Nets (pads, with @x,y where several pads share a name; then routed paths per layer and width w, separated by ;. In a path a pad name is that pad's centre, name@x,y a point inside that pad or via, vN(x,y) a via of type N, cw(c..) or ccw(c..) an arc to the next point about the centre after c; other vN are vias at no path point)
+1.8V: C21.1 C23.2 C24.1 C25.1 C32.2 C33.2 U1.5 U2.5 U3.5 U3.6 U4.5 U5.5 U5.6 U6.14 | length 56.8
  Top Layer w0.254: v1(19,15.401) 19.013,15.389 19.913,15.389 C25.1 19.894,15.345 19.894,14.894 19.275,14.275 U6.14 ; v1(19.35,21.951) 19.338,21.939 19.338,21.114 C21.1 19.338,21.089 21.083,21.089 U1.5 ; v1(19.375,25.651) 19.388,25.664 19.388,26.614 C24.1 U2.5 ; v1(22.324,5.901) 22.324,5.869 21.788,5.333 21.788,3.089 C23.2 22.375,3.076 22.885,3.586 23.227,3.586 23.45,3.809 U4.5 23.5,3.951 23.5,4.575 23.775,4.85 28.801,4.85 29.343,5.393 29.343,5.818 C32.2 27.863,5.875 27.7,6.038 U5.6 U5.5 ; v1(25.2,12.23) U3.5 U3.6
  Bottom Layer w0.254: v1(19.35,21.951) 20.152,21.951 ; v1(19.375,25.651) 19.375,25.649 20.152,24.872 20.152,21.951 ; v1(22.324,5.901) 22.324,7.876 ; v1(25.2,12.23) 25.158,12.23 22.324,9.396 22.324,7.876 ; 20.152,21.951 20.152,16.553 v1(19,15.401) 19,12.748 19.002,12.746 19.002,12.206 19,12.204 19,9.75 20.874,7.876 22.324,7.876
+5V: C22.2 J1.2 L1.1 L2.1 L3.1 R25.2 TP2.1 U4.1 U4.3 | length 74.4
  Top Layer w0.5: L1.1 8.413,9.526 ; L3.1 8.413,9.526 ; v1(13.975,14.551) 13.988,14.564 15.3,14.564 L2.1 ; R25.2 13.575,7.826 v1(13.55,7.801) 13.507,7.801 13.107,7.401 9.4,7.401 8.413,8.389 8.413,9.526 ; U4.1 23.55,1.801 23.55,2.232 23.895,2.576 24.906,2.576 25.25,2.232 25.25,1.951 25.251,1.95 C22.2 27.8,1.95 34.075,8.225 34.075,13.975 31.175,16.875 v1(27.55,16.875)
  Bottom Layer w0.5: v1(13.975,14.551) 12.95,13.526 12.95,8.401 v1(13.55,7.801) 17.15,4.201 24.901,4.201 28.825,8.125 28.825,15.6 27.525,16.9 27.525,18.02 TP2.1
GND: C21.2 C22.1 C23.1 C24.2 C25.2 C26.1 C27.1 C28.1 C29.2 C30.1 C31.1 C32.1 C33.1 D3.1 D4.1 D5.1 D6.1 J1.6 J1.A J2.A pad.A Q3.2 Q4.2 Q5.2 Q6.2 Q7.4 R8.1 R9.1 R15.1 R16.1 R19.1 R20.1 R21.1 R22.1 R23.1 R26.1 U1.2 U2.2 U3.2 U4.2 U5.2 U6.7 U7.2 U8.2 U9.B1 | length 30
  Top Layer w0.18: C26.1 C28.1 ; R19.1 6.754,15.597 6.925,15.426 ; 6.925,15.886 R19.1@6.925,15.941 ; v4(8.075,11.226) 8.4,11.226 ; U9.B1 8.4,11.226 ; v4(8.725,11.226) 8.4,11.226 ; Q7.4@8.776,13.026 9.391,13.026 9.591,13.226 v4(9.65,13.226) ; 9.575,16.226 8.375,16.226 7.21,16.226 R19.1@6.925,15.941 ; 9.775,14.651 9.75,14.626 8.375,14.626 7.363,14.626 R21.1@6.925,15.064 ; 9.775,15.676 9.775,17.126 10.701,18.052 ; 9.8,15.276 9.65,15.426 8.375,15.426 6.925,15.426 ; 9.875,13.851 9.85,13.826 8.375,13.826 7.1,13.826 6.925,14.001 R21.1@6.925,15.064 ; U8.2 v4(11.3,12.226) ; C29.2@10.855,8.876 C29.2 ; C27.1@15.275,13.651 C27.1 ; v1(17.35,13.376) 18.5,13.376 ; R21.1@6.925,15.064 6.925,15.426 ; 6.925,15.426 R19.1@6.925,15.941
  Top Layer w0.254: v4(7.025,8.851) C28.1 ; C31.1 v4(9.8,8.876) C29.2@10.855,8.876 ; C30.1@10.925,15.501 v4(10.925,16.226) ; v4(10.95,8.226) C29.2 ; C30.1 11.052,15.498 11.897,15.498 v4(11.925,15.526) ; v4(13.95,11.226) v4(14.875,11.226) ; v4(14.6,13.651) C27.1@15.275,13.651 ; v4(16.15,7.226) R26.1 v4(16.825,7.851)
  other v1: 26.5,0.901 21.8,1 12.3,2.2 18.825,3 27.95,3.95 10.9,5.5 23.475,5.75 12.9,5.9 16.5,6.126 18.125,6.301 6.2,7.201 30.975,7.275 18.2,8.075 18.325,10.251 26.675,10.625 24.5,10.65 31.25,12.175 18.35,12.476 18.3,14.4 17.525,16.026 33.8,16.075 25.175,16.55 14.5,16.626 12.825,16.676 19.5,19.351 16.975,19.801 9.05,20.001 26.25,20.225 14.65,21.301 9.2,22.276 19.15,23.201 24.7,24.05 14.725,27.126 7.85,27.801 26.875,28.776 14.825,29.026 18.175,29.051
LaserChoice_0: TP4.1 U1.1 U2.1 U3.4 U6.1 U6.13 | length 31.2
  Top Layer w0.254: U6.1 19.275,9.475 19.95,10.15 v1(19.95,10.275) ; v1(19.925,12.092) U6.13 ; v1@20.027,11.953 20.144,11.953 20.397,11.7 23.824,11.7 24.232,12.108 v1(24.232,12.882) ; U2.1 23.713,25.569 24.381,25.569 25.573,24.377 25.573,21.173 24.526,20.126 23.363,20.126 23.2,19.963 23.2,16.345 23.808,15.737 24.087,15.737 24.25,15.574 U3.4 24.241,15.286 24.241,12.891 v1@24.225,12.875
  Bottom Layer w0.254: v1(19.925,12.092) 19.938,12.079 19.938,10.287 v1(19.95,10.275) ; v1(24.232,12.882) 26.143,12.882 26.592,12.433 TP4.1
LaserChoice_1: TP5.1 U1.3 U2.3 U5.4 U6.2 U6.5 | length 39.9
  Top Layer w0.254: U6.2 19.925,9.2 20.575,9.85 v1@21.8,9.85 ; U6.5 21.844,7.732 21.844,9.806 v1@21.8,9.85 ; U1.3@23.605,22.036 23.877,22.036 24.03,22.189 24.03,23.007 v1(24.05,23.026) ; U2.3 23.855,27.576 24.018,27.739 24.018,28.494 v1(24.025,28.501) ; U5.4 24.78,6.195 23.975,7 v1(23.975,9.075) 23.2,9.85 v1@21.8,9.85
  Bottom Layer w0.254: v1(21.814,9.85) 23.582,11.618 23.582,12.514 23.58,12.516 23.58,14.681 24.025,15.126 v1(24.025,28.501) ; v1(23.975,9.075) 24.925,8.125 27.1,8.125 27.5,8.525 TP5.1
MOSFET_1: D3.2 Q1.3 Q3.3 R5.1 | length 13.7
  Top Layer w0.254: Q1.3 1.708,6.813 2.087,6.813 2.466,6.434 3.866,6.434 4.5,5.801 4.5,5 5.799,3.701 Q3.3 7.975,3.726 R5.1 ; Q3.3@8,3.801 8.223,4.024 10.999,4.024 D3.2
MOSFET_2: D4.2 Q1.1 Q4.3 R7.1 | length 21.2
  Top Layer w0.254: Q1.1 1.86,8.876 2.402,9.418 5.327,9.418 8.145,6.6 10.9,6.6 13.768,3.732 14.345,3.732 Q4.3 14.45,3.826 D4.2@17.05,3.826 ; Q4.3@14.325,3.826 R7.1 ; D4.2@17.05,3.826 D4.2@17.4,4.176 ; D4.2@17.05,3.826 D4.2@17.4,4.176 ; D4.2@17.4,4.176 D4.2 D4.2@17.4,4.176
MOSFET_3: D5.2 Q2.1 Q5.3 R11.1 | length 13.3
  Top Layer w0.254: Q2.1 4.043,21.139 5.613,21.139 v1(5.625,21.151) ; R11.1 11.025,22.126 11.025,21.251 v1(11.075,21.201) 13.1,21.201 D5.2 13.325,21.126 13.325,18.549 13.548,18.326 Q5.3
  Bottom Layer w0.254: v1(5.625,21.151) 5.638,21.164 11.038,21.164 v1(11.075,21.201)
MOSFET_4: D6.2 Q2.3 Q6.3 R13.1 | length 14.3
  Top Layer w0.254: Q2.3 4.055,23.051 5.6,23.051 v1(5.625,23.076) ; R13.1 10.963,25.339 10.963,24.239 v1(10.975,24.226) 10.988,24.239 13.563,24.239 Q6.3 13.573,24.251 13.35,24.474 13.35,27.026 D6.2
  Bottom Layer w0.254: v1(5.625,23.076) 6.775,24.226 v1(10.975,24.226)
NetC1_1: C1.1 C2.1 C3.1 C4.1 C5.1 D1.1 Q1.2 R15.2 TP8.1 | length 11.2
  Top Layer w0.254: v4(0.45,9.376) 0.45,7.926 ; Q1.2 0.45,7.926 ; R15.2 0.9,5.6 0.45,6.05 0.45,7.926
  Bottom Layer w0.254: v4(0.45,9.376) 0.45,10.826 ; v4(0.725,12.551) 0.45,12.276 0.45,10.826 ; TP8.1 1.725,10.826 0.45,10.826
NetC6_1: C6.1 C7.1 C8.1 C9.1 C10.1 D1.2 Q1.5 R8.2 TP6.1 | length 9.9
  Top Layer w0.254: Q1.5 5.25,7.926 v4(5.275,7.951) 5.303,7.923 5.303,5.674 R8.2
  Bottom Layer w0.254: v4(3.4,12.8) 3.4,12.327 4.868,10.858 5.227,10.858 5.275,10.81 TP6.1@5.275,10.451 ; v4(5.275,7.951) TP6.1@5.275,10.451 ; TP6.1 TP6.1@5.275,10.451
NetC11_1: C11.1 C12.1 C13.1 C14.1 C15.1 D1.3 Q2.5 R9.2 TP7.1 | length 15.5
  Top Layer w0.254: v4(0.45,20.601) 0.45,22.076 ; Q2.5 0.45,22.076 ; R9.2 0.9,24.3 0.45,23.85 0.45,22.076
  Bottom Layer w0.254: v4(0.45,20.601) 0.45,18.326 1.5,17.276 v4(3.475,17.276) 4,17.801 4,18.651 4.6,19.251 TP7.1
NetC16_1: C16.1 C17.1 C18.1 C19.1 C20.1 D1.4 Q2.2 R16.2 TP9.1 | length 10
  Top Layer w0.18: v4@5.025,22.077 5.495,22.077 6.3,22.881 R16.2
  Top Layer w0.254: Q2.2 v4(5.025,22.076)
  Bottom Layer w0.254: TP9.1 3.018,19.251 ; v4(3.018,18.169) 3.018,19.251 ; v4(5.025,22.076) 3.075,20.126 3.075,20.09 3.018,20.033 3.018,19.251
NetC26_2: C26.2 C28.2 L1.2 U9.A1 | length 4.4
  Top Layer w0.18: L1.2 C28.2 C26.2 6.165,10.566 6.165,10.941 6.95,11.726 U9.A1
NetC27_2: C27.2 L2.2 U7.5 | length 2.5
  Top Layer w0.18: U7.5 16.275,12.301 16.275,13.626 16.3,13.651 L2.2
NetC29_1: C29.1 R17.2 U8.1 | length 2.4
  Top Layer w0.18: U8.1 10.75,10.731 C29.1 11.02,10.601 R17.2
NetC30_2: C30.2 R24.2 U8.3 | length 2.3
  Top Layer w0.18: U8.3 10.76,13.646 C30.2 11.015,13.801 R24.2
NetC31_2: C31.2 L3.2 U8.5 | length 3.3
  Top Layer w0.18: L3.2 C31.2 v4(9.8,11.151) ; v4(9.486,12.19) 9.504,12.208 9.992,12.208 U8.5
  Bottom Layer w0.18: v4(9.486,12.19) 9.486,12.131 9.8,11.817 v4(9.8,11.151)
NetD1_5: D1.5 D2.1 Q7.3
  other v2: 7.1,18.701 7.425,18.701 7.725,18.701 7.1,19.026 7.425,19.026 7.725,19.026 7.1,19.326 7.425,19.326 7.725,19.326
  other v3: 7.85,13.426 8.113,13.426 8.375,13.426 8.638,13.426 8.9,13.426 0.34,13.569 0.575,13.685 0.34,13.835 0.575,13.951 0.34,14.101 0.575,14.217 7.85,14.226 8.113,14.226 8.375,14.226 8.638,14.226 8.9,14.226 0.34,14.367 0.575,14.483 0.34,14.633 0.575,14.749 0.34,14.899 0.575,15.015 7.85,15.026 8.113,15.026 8.375,15.026 8.638,15.026 8.9,15.026 0.34,15.165 0.575,15.281 0.34,15.431 0.575,15.547 0.34,15.697 0.575,15.813 7.85,15.826 8.113,15.826 8.375,15.826 8.638,15.826 8.9,15.826 0.34,15.963 0.575,16.079 0.34,16.229 0.575,16.344 0.34,16.494 7.85,16.626 8.113,16.626 8.375,16.626 8.638,16.626 8.9,16.626
NetJ1_4: J1.4 U3.3 | length 12.4
  Top Layer w0.254: U3.3 24.282,17.837 24.282,18.791 24.677,19.187 v1(24.677,19.334) ; J1.4 v1(30.5,14.375)
  Bottom Layer w0.254: v1(24.677,19.334) 25.137,18.875 28.15,18.875 28.4,18.625 28.4,16.9 30.414,14.886 30.414,14.461 v1(30.5,14.375)
NetJ1_5: J1.5 U5.3 | length 6.2
  Top Layer w0.254: U5.3 25.8,10.8 27.968,12.968 28.743,12.968 J1.5
NetJ2_1: J2.1 R18.2 | length 6.5
  Top Layer w0.18: R18.2 7.131,21.031 ccw(c5.335,22.827) 7.875,22.827 J2.1
NetQ3_1: Q3.1 R6.2 | length 13.7
  Top Layer w0.254: Q3.1 7.05,1.701 8.348,2.999 17.63,2.999 18.482,3.851 R6.2
NetQ4_1: Q4.1 R10.2 | length 6.7
  Top Layer w0.254: Q4.1 13.4,1.726 14.002,2.328 16.789,2.328 16.791,2.326 R10.2
NetQ5_1: Q5.1 R12.2 | length 2.3
  Top Layer w0.254: Q5.1 15.713,17.439 17.838,17.439 R12.2
NetQ6_1: Q6.1 R14.2 | length 2.2
  Top Layer w0.254: Q6.1 15.688,23.289 17.888,23.289 R14.2
NetQ7_1: Q7.1 U9.A2 U9.B2 | length 0.4
  Top Layer w0.23: U9.A2 U9.B2
NetR6_1: R6.1 U6.3 | length 3.2
  Top Layer w0.254: R6.1 19.75,5.95 20.575,6.775 U6.3
NetR10_1: R10.1 U6.6 | length 7.9
  Top Layer w0.254: R10.1 20.426,1.326 20.8,1.7 20.8,5.3 22.525,7.025 U6.6
NetR12_1: R12.1 U6.11 | length 6.7
  Top Layer w0.254: R12.1 18.707,18.501 21.225,15.983 U6.11
NetR14_1: R14.1 U6.8 | length 17.1
  Top Layer w0.254: R14.1 v1(21,24.301) ; v1(22.875,12.377) 22.875,12.478 23.175,12.778 U6.8
  Bottom Layer w0.254: v1(21,24.301) 22.375,22.927 22.375,12.877 v1(22.875,12.377)
NetR17_1: R17.1 R24.1 U7.1 | length 7.4
  Top Layer w0.18: R17.1 12.086,9.591 12.54,9.591 13.025,10.076 13.025,11.776 13.425,12.176 ; R24.1 12.55,14.801 13.025,14.326 13.025,12.576 13.425,12.176 ; U7.1 13.425,12.176
NetR25_1: R25.1 R26.2 U7.4 | length 2.8
  Top Layer w0.18: R25.1 14.813,8.839 16.138,8.839 R26.2 U7.4
NetU1_4: U1.4 U6.12 | length 14.1
  Top Layer w0.254: U6.12 20.575,12.825 20.918,12.482 21.722,12.482 v1(21.826,12.378) ; U1.4 21.175,22.106 v1(21.175,23.001)
  Bottom Layer w0.254: v1(21.175,23.001) 21.826,22.35 v1(21.826,12.378)
NetU1_6: U1.6 U6.4 | length 12.5
  Top Layer w0.254: U1.6 21.148,20.073 v1(21.148,19.1) ; v1(21.175,8.838) 21.2,8.812 21.2,7.726 U6.4
  Bottom Layer w0.254: v1(21.148,19.1) 21.162,19.087 21.162,8.851 v1(21.175,8.838)
NetU2_4: U2.4 U6.9 | length 15.6
  Top Layer w0.254: U2.4 22.075,27.576 22.45,27.201 22.45,24.955 22.95,24.455 v1(22.95,24.35) ; U6.9 22.525,14.507 23.027,15.009 v1(23.027,15.05)
  Bottom Layer w0.254: v1(22.95,24.35) 22.989,24.311 22.989,15.089 v1(23.027,15.05)
NetU2_6: U2.6 U6.10 | length 12.7
  Top Layer w0.254: U2.6 21.41,25.676 21.573,25.513 21.573,25.308 22.075,24.806 22.075,19.65 21.875,19.45 U6.10
NetU8_4: U8.4 U9.C2 | length 1.5
  Top Layer w0.18: U9.C2 9.364,12.69 9.974,12.69 U8.4
NetU8_6: U8.6 U9.C1 | length 1.2
  Top Layer w0.18: U9.C1 U8.6
Shunt_Sens: C1.2 C2.2 C3.2 C4.2 C5.2 C6.2 C7.2 C8.2 C9.2 C10.2 C11.2 C12.2 C13.2 C14.2 C15.2 C16.2 C17.2 C18.2 C19.2 C20.2 R18.1 R19.2 R20.2 R21.2 R22.2 R23.2
Start_Sig: J1.3 TP3.1 U3.1 U5.1 U7.3 | length 29.6
  Top Layer w0.254: U7.3 14.056,10.382 14.857,10.382 15.402,10.927 20.623,10.927 21.025,10.525 23.325,10.525 23.9,9.95 25.225,9.95 ; U3.1 26.313,17.642 26.313,17.161 27.849,15.625 ; U5.1 27.7,7.775 27.45,7.525 25.5,7.525 25.225,7.8 25.225,9.95 ; J1.3 27.849,15.625 ; 25.225,9.95 25.225,10.825 27.489,13.089 27.489,14.039 v1(27.5,14.05) 27.5,14.122 27.849,14.472 27.849,15.625
  Bottom Layer w0.254: v1(27.5,14.05) TP3.1@27.5,15.239
VCC: D2.2 J1.1 R1.1 R2.1 R3.1 R4.1 R5.2 R7.2 R11.2 R13.2 TP1.1 | length 24.9
  Top Layer w0.254: v1(8.975,4.751) R5.2 ; v1(9.25,24.901) 10.202,24.901 ; D2.2 10.202,19.374 10.202,23.176 ; v1(10.9,27.401) 10.25,26.751 10.25,26.701 10.202,26.653 10.202,26.374 ; R13.2 10.225,26.351 10.202,26.374 ; R11.2 10.202,23.176 ; v1(15.325,4.826) R7.2 ; 10.202,23.176 10.202,24.901 ; 10.202,24.901 10.202,26.374
  Bottom Layer w0.254: v1(10,2) 8.975,3.025 v1(8.975,4.751) 9.05,4.826 v1(15.325,4.826) ; v4(27.5,19.825) TP1.1 27.525,20.876 v4(28.65,20.876)
  other v2: 28.125,21.751 28.6,21.751 28.125,22.073 28.6,22.073 28.125,22.394 28.6,22.394 28.125,22.716 28.6,22.716 28.125,23.037 28.6,23.037 28.125,23.358 28.6,23.358 28.125,23.68 28.6,23.68 28.125,24.001 28.6,24.001 28.125,24.323 28.6,24.323 28.125,24.644 28.6,24.644 28.125,24.966 28.6,24.966 28.125,25.287 28.6,25.287 28.125,25.608 28.6,25.608 28.125,25.93 28.6,25.93 28.125,26.251 28.6,26.251
  other v4: 28.65,19.224 29.225,19.599 28.65,20.05 29.225,20.474
VCC_Drain: Q1.4 Q1.6 Q2.4 Q2.6 R1.2 R2.2 R3.2 R4.2 | length 8.9
  Top Layer w0.254: v4(1.5,21.126) 1.513,21.114 2.738,21.114 v4(2.75,21.101) 2.763,21.114 2.763,22.989 v4(2.775,23.001) 2.763,23.014 1.538,23.014 v4(1.5,23.051) ; v4(4.055,6.976) 4.03,6.951 2.825,6.951 v4(2.8,6.926) v4(2.8,7.876) v4(2.8,8.851) 2.813,8.864 4.043,8.864 v4(4.055,8.876)
  other v2: 26.075,21.676 26.075,21.998 26.075,22.319 26.075,22.641 26.075,22.962 26.075,23.283 26.075,23.605 26.075,23.926 26.075,24.248 26.075,24.569 26.075,24.891 26.075,25.212 26.075,25.533 26.075,25.855 26.075,26.176
  other v4: 2.75,22.051
pads on no net: J1.B U4.4

## Polygon pours and split planes (outlines as drawn)
GND on Bottom Layer "NONET_L-01_P-001" (solid, remove dead copper, pour order 2): 0,30.001 0,20.376 7.75,20.376 11.95,16.176 16.45,16.176 17.85,14.776 17.85,7.401 17.2,6.751 7.625,6.751 4.75,9.626 0,9.626 0,0.001 35,0.001 35,30.001
GND on Top Layer "NONET_L-01_P-001" (solid, remove dead copper, pour order 1): 0,30.001 0,20.376 7.75,20.376 11.95,16.176 16.45,16.176 17.85,14.776 17.85,7.401 17.2,6.751 7.625,6.751 4.75,9.626 0,9.626 0,0.001 35,0.001 35,30.001
GND on GND (split plane): 8.798,13.503 0.51,13.503 0.51,16.499 8.798,16.499
GND on GND (split plane): 11.822,15.973 11.874,15.933 11.935,15.908 12,15.899 16.421,15.899 17.573,14.747 17.573,7.506 17.071,7.003 7.68,7.003 4.904,9.78 4.851,9.82 4.791,9.845 4.725,9.853 0.51,9.853 0.51,12.999 9.05,12.999 9.116,13.008 9.176,13.033 9.229,13.073 9.269,13.125 9.294,13.186 9.302,13.251 9.302,16.751 9.294,16.817 9.269,16.877 9.229,16.93 9.176,16.97 9.116,16.995 9.05,17.003 0.51,17.003 0.51,20.124 7.671,20.124
GND on GND (split plane): 32.217,29.484 32.433,29.455 32.645,29.408 32.852,29.343 33.053,29.26 33.246,29.159 33.429,29.042 33.602,28.91 33.762,28.763 33.909,28.603 34.041,28.431 34.158,28.247 34.258,28.054 34.342,27.854 34.407,27.646 34.454,27.434 34.482,27.218 34.491,27.017 34.49,27.001 34.49,3 34.491,2.984 34.482,2.783 34.454,2.567 34.407,2.355 34.342,2.148 34.258,1.947 34.158,1.754 34.041,1.571 33.909,1.398 33.762,1.238 33.602,1.091 33.429,0.959 33.246,0.842 33.053,0.742 32.852,0.658 32.645,0.593 32.433,0.546 32.217,0.518 32.016,0.509 32,0.51 3,0.51 2.984,0.509 2.783,0.518 2.567,0.546 2.355,0.593 2.148,0.658 1.947,0.742 1.754,0.842 1.571,0.959 1.398,1.091 1.238,1.238 1.091,1.398 0.959,1.571 0.842,1.754 0.742,1.947 0.658,2.148 0.593,2.355 0.546,2.567 0.518,2.783 0.509,2.984 0.51,3 0.51,9.349 4.621,9.349 7.397,6.573 7.42,6.556 7.449,6.533 7.51,6.508 7.575,6.499 17.175,6.499 17.241,6.508 17.301,6.533 17.354,6.573 18.004,7.223 18.044,7.275 18.069,7.336 18.077,7.401 18.077,14.851 18.069,14.917 18.044,14.977 18.004,15.03 16.704,16.33 16.651,16.37 16.591,16.395 16.525,16.403 12.105,16.403 7.954,20.555 7.901,20.595 7.841,20.62 7.775,20.628 0.51,20.628 0.51,27.001 0.509,27.017 0.518,27.218 0.546,27.434 0.593,27.646 0.658,27.854 0.742,28.054 0.842,28.247 0.959,28.431 1.091,28.603 1.238,28.763 1.398,28.91 1.571,29.042 1.754,29.159 1.947,29.26 2.148,29.343 2.355,29.408 2.567,29.455 2.783,29.484 2.984,29.492 3,29.491 32,29.491 32.016,29.492
GND on VCC (split plane): 8.798,13.503 0.51,13.503 0.51,16.499 8.798,16.499
GND on VCC (split plane): 11.822,16.023 11.874,15.983 11.935,15.958 12,15.949 16.296,15.949 17.598,14.647 17.598,7.481 17.096,6.978 7.73,6.978 4.929,9.78 4.876,9.82 4.816,9.845 4.75,9.853 0.51,9.853 0.51,12.999 9.05,12.999 9.116,13.008 9.176,13.033 9.229,13.073 9.269,13.125 9.294,13.186 9.302,13.251 9.302,16.751 9.294,16.817 9.269,16.877 9.229,16.93 9.176,16.97 9.116,16.995 9.05,17.003 0.51,17.003 0.51,20.099 7.746,20.099
VCC_Drain on VCC (split plane): 26.624,24.951 26.624,21.228 24.625,21.228 24.586,21.222 24.55,21.207 24.518,21.183 21.193,17.858 21.169,17.827 21.163,17.812 21.154,17.79 21.149,17.751 21.149,4.989 19.063,2.903 6.738,2.903 3.382,6.258 3.351,6.282 3.314,6.297 3.275,6.303 0.51,6.303 0.51,9.349 4.646,9.349 7.447,6.548 7.499,6.508 7.56,6.483 7.625,6.474 17.2,6.474 17.266,6.483 17.326,6.508 17.379,6.548 18.029,7.198 18.046,7.221 18.069,7.25 18.094,7.311 18.102,7.376 18.102,14.751 18.094,14.817 18.069,14.877 18.046,14.907 18.029,14.93 16.579,16.38 16.526,16.42 16.466,16.445 16.4,16.453 12.105,16.453 8.029,20.53 7.976,20.57 7.916,20.595 7.85,20.603 0.51,20.603 0.51,24.1 19.825,24.1 19.864,24.105 19.901,24.12 19.932,24.144 22.057,26.269 22.413,26.625 26.624,26.625
VCC on VCC (split plane): 32.217,29.484 32.433,29.455 32.645,29.408 32.852,29.343 33.053,29.26 33.246,29.159 33.429,29.042 33.602,28.91 33.762,28.763 33.909,28.603 34.041,28.431 34.158,28.247 34.258,28.054 34.342,27.854 34.407,27.646 34.454,27.434 34.482,27.218 34.491,27.017 34.49,27.001 34.49,3 34.491,2.984 34.482,2.783 34.454,2.567 34.407,2.355 34.342,2.148 34.258,1.947 34.158,1.754 34.041,1.571 33.909,1.398 33.762,1.238 33.602,1.091 33.429,0.959 33.246,0.842 33.053,0.742 32.852,0.658 32.645,0.593 32.433,0.546 32.217,0.518 32.016,0.509 32,0.51 3,0.51 2.984,0.509 2.783,0.518 2.567,0.546 2.355,0.593 2.148,0.658 1.947,0.742 1.754,0.842 1.571,0.959 1.398,1.091 1.238,1.238 1.091,1.398 0.959,1.571 0.842,1.754 0.742,1.947 0.658,2.148 0.593,2.355 0.546,2.567 0.518,2.783 0.509,2.984 0.51,3 0.51,6 3.213,6 6.568,2.644 6.6,2.62 6.636,2.605 6.675,2.6 19.125,2.6 19.164,2.605 19.186,2.614 19.201,2.62 19.232,2.644 21.407,4.819 21.431,4.851 21.446,4.887 21.452,4.926 21.452,17.689 24.688,20.925 26.775,20.925 26.814,20.93 26.851,20.945 26.882,20.969 26.906,21.001 26.921,21.037 26.927,21.076 26.927,24.951 26.927,26.776 26.921,26.815 26.906,26.852 26.882,26.883 26.851,26.907 26.814,26.922 26.775,26.928 22.35,26.928 22.311,26.922 22.275,26.907 22.243,26.883 21.843,26.483 19.763,24.403 0.51,24.403 0.51,27.001 0.509,27.017 0.518,27.218 0.546,27.434 0.593,27.646 0.658,27.854 0.742,28.054 0.842,28.247 0.959,28.431 1.091,28.603 1.238,28.763 1.398,28.91 1.571,29.042 1.754,29.159 1.947,29.26 2.148,29.343 2.355,29.408 2.567,29.455 2.783,29.484 2.984,29.492 3,29.491 32,29.491 32.016,29.492

## Other copper
Top Layer:
  rectangle net GND: 9.275,13.726 10.275,17.626
  rectangle net GND: 6.375,16.926 9.575,17.626
  rectangle net VCC_Drain: 25.85,21.451 26.8,26.426
  rectangle net GND: 6.375,12.501 7.45,17.626
  rectangle net Shunt_Sens: 4.575,11.651 6.1,18.376
  region net Shunt_Sens: 0.275,20.026 4.875,20.026 6.1,18.801 6.1,17.776 4.789,18.042 4.236,18.596 0.275,18.596
  region net VCC: 27.3,26.426 28.675,26.426 29.45,25.651 29.45,17.775 28.15,17.775 27.3,18.625
  region net NetC6_1: 4.2,11.851 3.625,11.851 3.625,12.226 2.375,13.476 2.375,14.101 2.175,14.301 1.425,14.301 1.425,14.951 4.2,14.951
  region net NetQ7_1: 7.7,13.026 8.25,13.026 8.513,12.763 8.513,12.119 7.888,12.119 7.7,12.307 7.7,12.551
  region net NetC11_1: 4.2,18.171 3.625,18.171 3.625,17.796 2.375,16.546 2.375,15.921 2.175,15.721 1.425,15.721 1.425,15.171 4.2,15.171
  region net NetC16_1: 1.219,16.039 1.219,16.678 0.275,17.621 0.275,18.371 3.275,18.371 3.275,17.746 2.175,16.646 2.175,16.039
  region net NetC1_1: 1.219,13.984 1.219,13.345 0.275,12.401 0.275,11.651 3.275,11.651 3.275,12.276 2.175,13.376 2.175,13.984
  region net Shunt_Sens: 0.275,10.026 4.825,10.026 6.1,11.301 6.1,12.247 4.789,11.98 4.236,11.426 0.275,11.426
Bottom Layer:
  rectangle net NetD1_5: 6.925,16.626 7.9,19.551
  region net NetD1_5: 9.05,16.776 0.181,16.776 0.181,13.226 9.05,13.226
VCC (plane layer: these items are gaps in the copper):
  lines w0.3: -0.025,6.151 3.275,6.151 6.675,2.751 19.125,2.751 21.3,4.926 21.3,17.751 24.625,21.076 26.775,21.076 26.775,24.951 26.775,26.776 22.35,26.776 21.95,26.376 19.825,24.251 0.35,24.251 0,23.901
  lines w0.5: -0.05,16.751 9.05,16.751 9.05,13.251 0.15,13.251 ; -0.05,20.351 7.85,20.351 12,16.201 16.4,16.201 17.85,14.751 17.85,7.376 17.2,6.726 7.625,6.726 4.75,9.601 0.075,9.601
GND (plane layer: these items are gaps in the copper):
  lines w0.5: -0.05,16.751 9.05,16.751 9.05,13.251 0.15,13.251 ; -0.025,9.601 4.725,9.601 7.575,6.751 17.175,6.751 17.825,7.401 17.825,14.851 16.525,16.151 12,16.151 7.775,20.376 0,20.376

## Silkscreen, mask and mechanical layers (free items; w line width, h text height)
Bottom Overlay:
  text "VCC" at 26.4,20.151 h1
  text "Ch3" at 7.5,17.401 h1
  text "Ch4" at 3.35,17.376 h1
  text "5V" at 26.2,17.376 h1
  text "Start_Sig" at 26.525,14.659 h1
  text "LaserCh_0" at 26.35,11.968 h1
  text "LaserCh_1" at 26.325,8.993 h1
  text "Ch1" at 3.3,8.901 h1
  text "Ch2" at 7.575,8.876 h1
Mechanical 1:
  the board outline again, w0.1